# EAGLE board MS14-N.v1.3 (EAGLE 7.5.0)
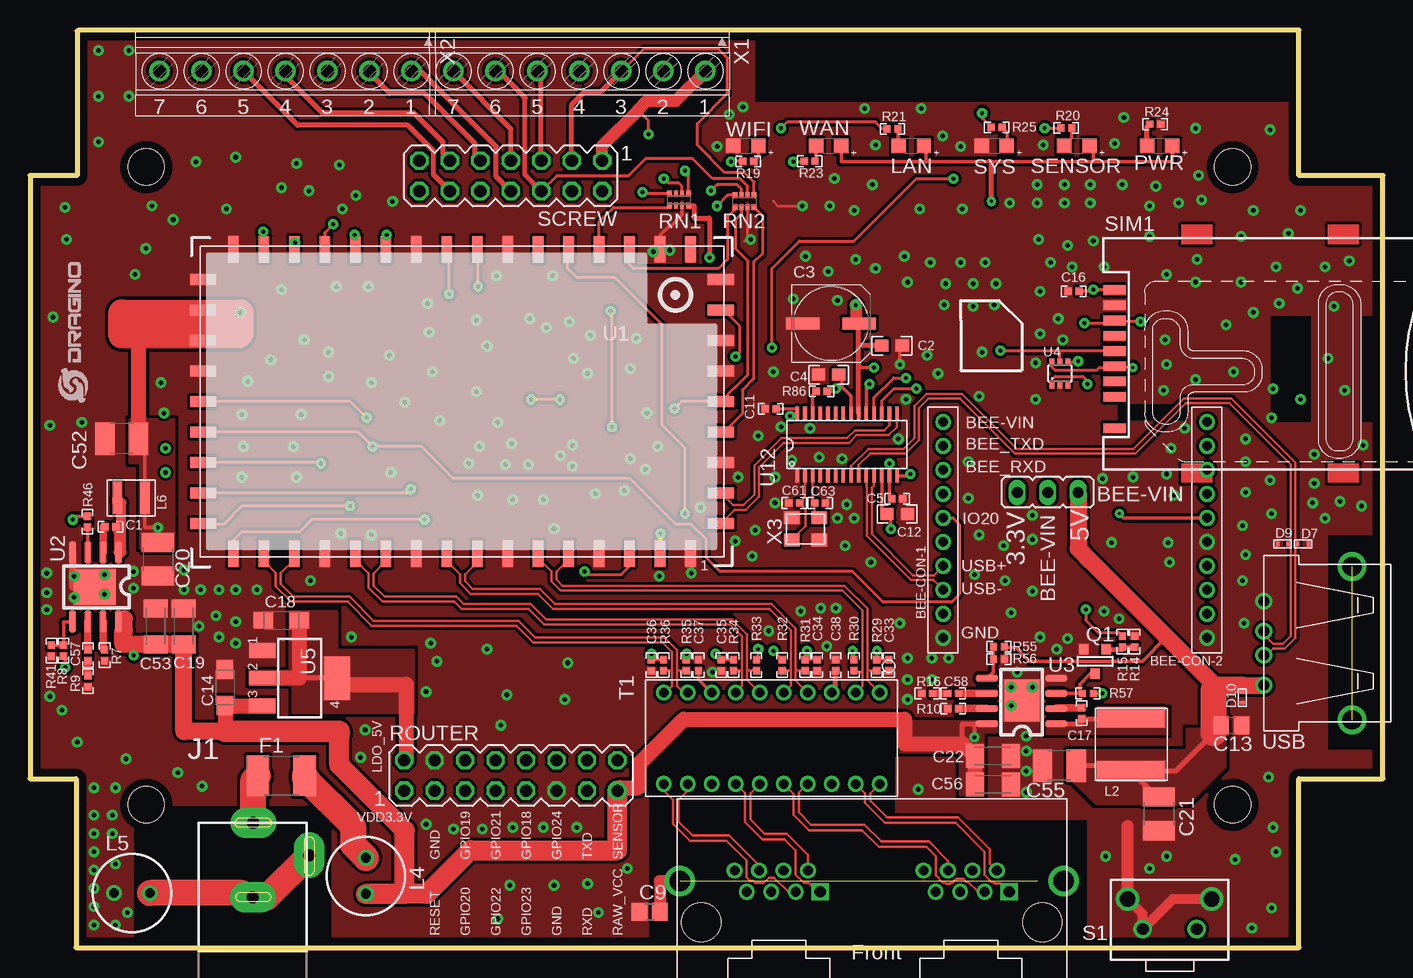
[diagram p0: board, top side]
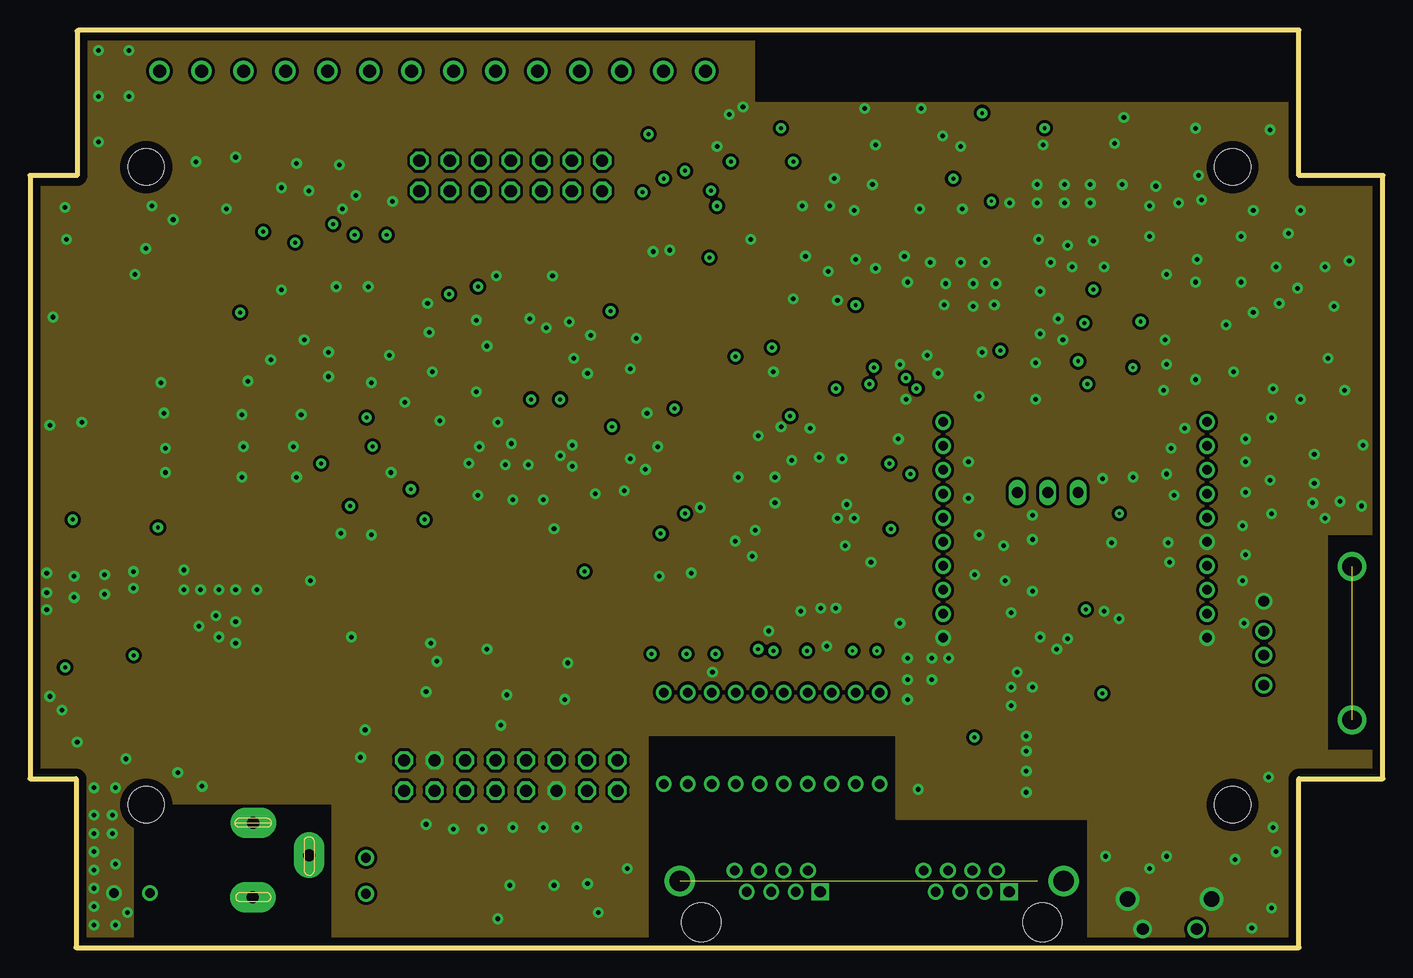
[diagram p1: board, inner layer Route2]
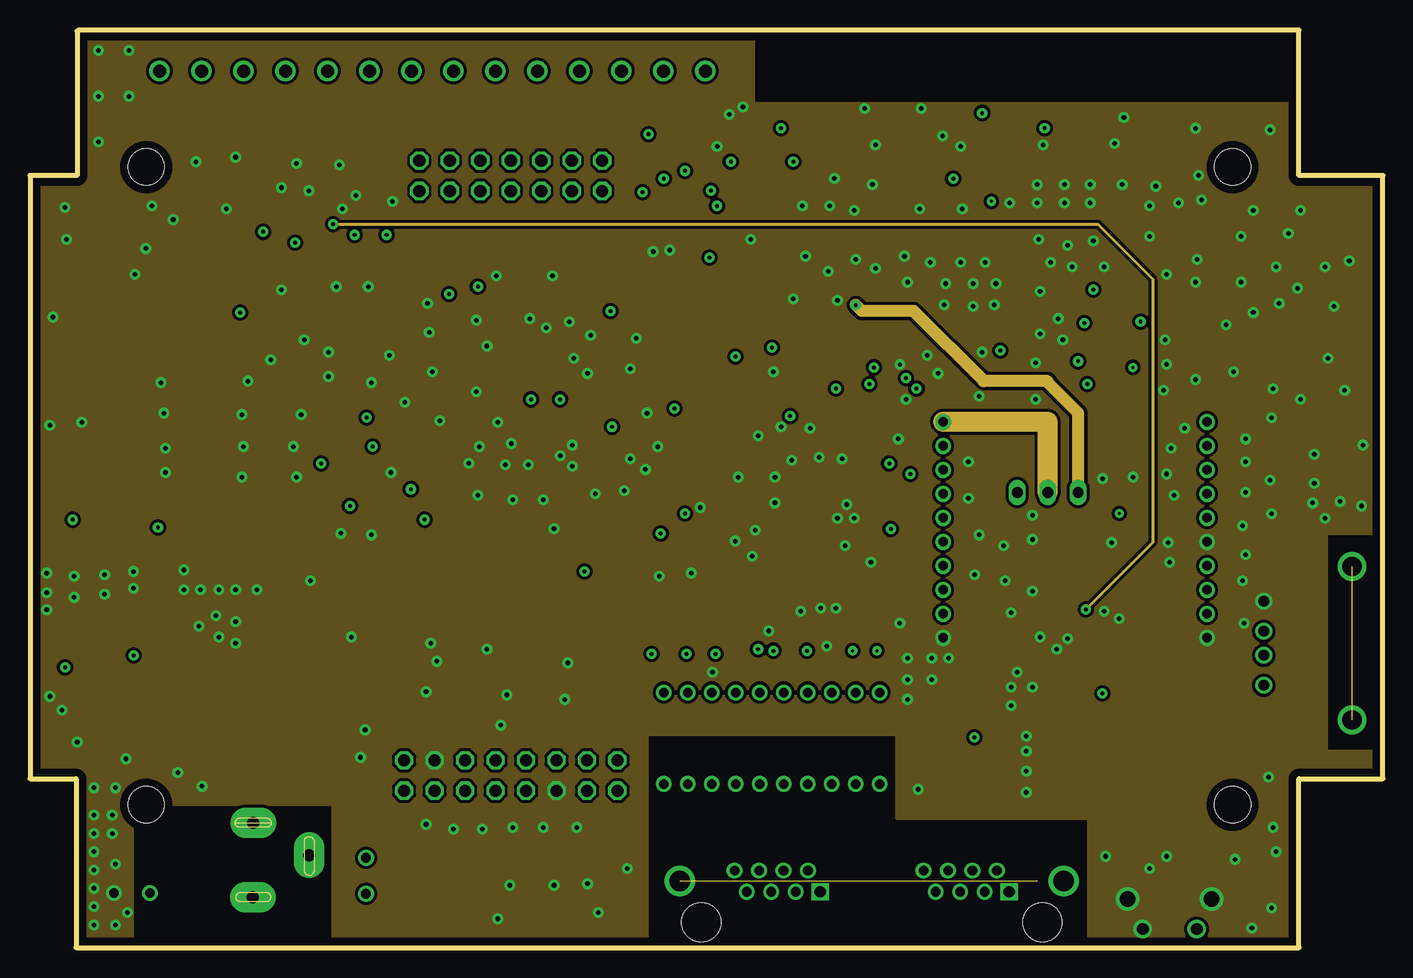
[diagram p2: board, inner layer Route15]
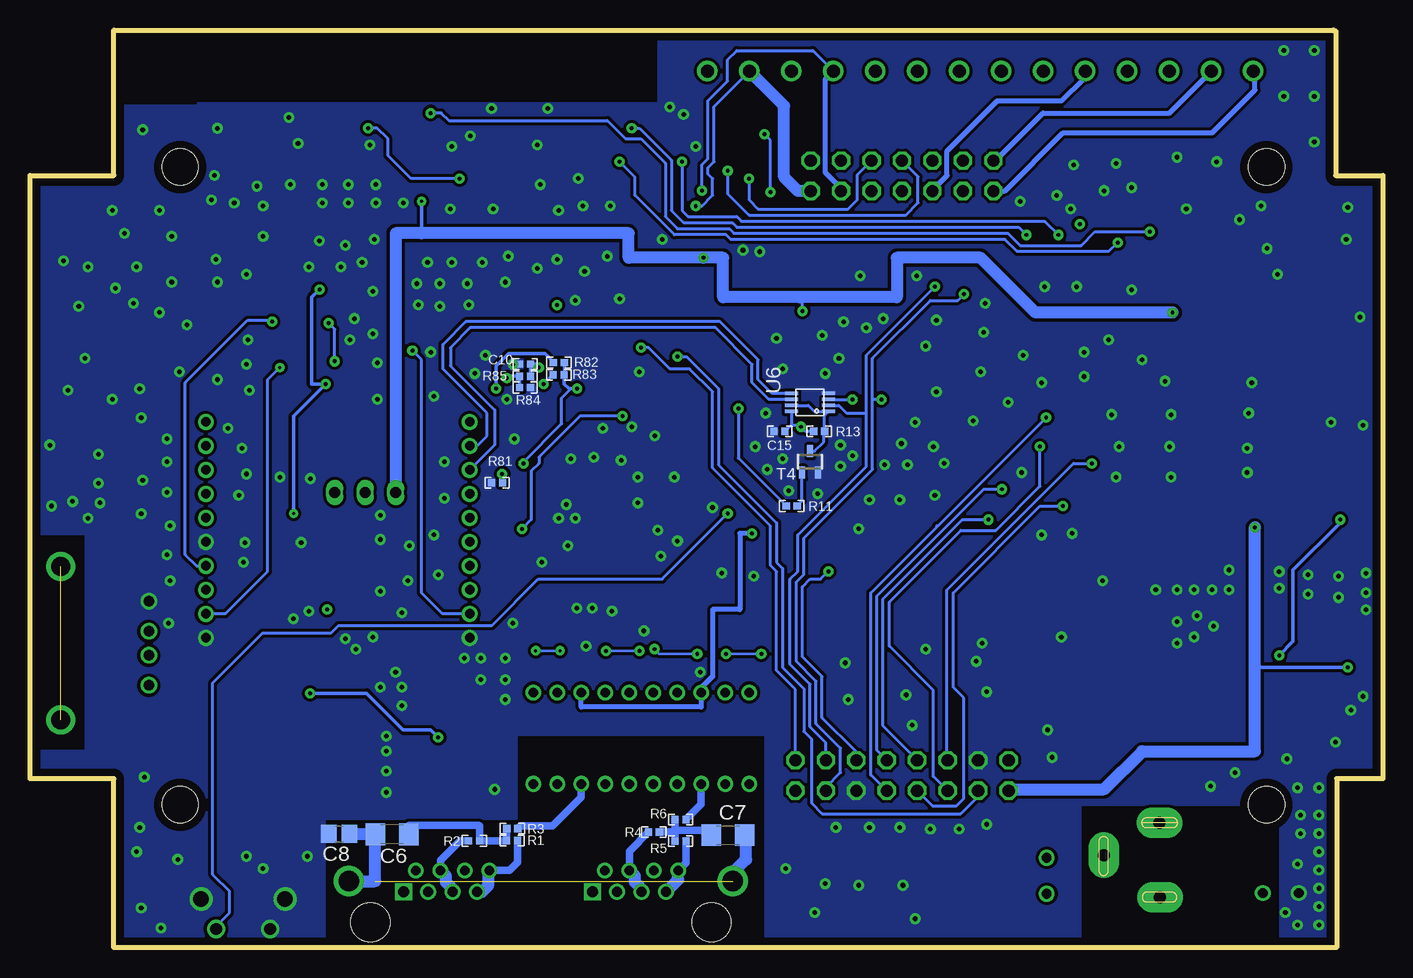
[diagram p3: board, bottom side, seen from below]

Size 112.78 x 76.5 mm. Coordinates in mm from the lower left corner, seen from the top.
Outline: 105.79,0 105.79,14.08 112.78,14.08 112.78,64.37 105.79,64.37 105.79,76.5 4.1,76.5 4.1,76.44 3.94,76.44 3.94,64.37 0,64.37 0,14.08 3.85,14.08 3.85,0 105.79,0
Copper layers (1*2+15*16): Top 0.035mm / dielectric 1.5mm / Route2 0.035mm / dielectric 0.15mm / Route15 0.035mm / dielectric 0.2mm / Bottom 0.035mm
Design rules "default *": minimum track width 5mil, minimum drill 10mil, track to track 8mil, track to pad 8mil, pad to pad 8mil, via to via 10mil, smd to smd 8mil, copper to edge 26mil, drill to drill 10mil, minimum pad ring 10mil, minimum via ring 10mil, stop-mask expansion 1mil, vias tented up to drill 30mil, thermal gap 10mil
Net classes: 0 default: width 0.203 mm, clearance 0.152 mm; 1 power: width 0.61 mm, drill 0.406 mm, clearance 0.254 mm; 2 gnd: width 0.305 mm, drill 0.33 mm, clearance 0.254 mm; 3 usbvcc: width 0.508 mm, drill 0.61 mm, clearance 0.254 mm; 4 aref: width 0.406 mm, drill 0.61 mm, clearance 0.254 mm; 6 usbtrace-4layer: width 0.191 mm, clearance 0.203 mm
Holes 3 mm at 100.25,11.91 9.7,11.91 9.7,65.08 100.25,65.08
bRestrict: area 98.9,70.3 to 105,75.9

## Footprints (pad centres in the part's own frame; a part is rotated, then mirrored left to right if it is on the bottom)
10P-2.0MM = drill 0.8 pad 1.27: 1 0,9; 2 0,7; 3 0,5; 4 0,3; 5 0,1; 6 0,-1; 7 0,-3; 8 0,-5; 9 0,-7; 10 0,-9
JP2 = drill 0.914 long: 1 -2.54,0; 2 0,0; 3 2.54,0
C0402 = smd 0.61 x 0.61: 1 -0.457,0; 2 0.457,0
C0603 = smd 1.1 x 1: 1 -0.85,0; 2 0.85,0
UD-6,3X5,8_NICHICON = smd 2.8 x 1: + 2.35,0; - -2.35,0
C1206 = smd 1.6 x 1.8: 1 -1.4,0; 2 1.4,0
C0805 = smd 1.3 x 1.5: 1 -0.85,0; 2 0.85,0
SMC_A = smd 1.6 x 1.4: + -1.5,0; - 1.5,0
C1206K = smd 1.5 x 2: 1 -1.5,0; 2 1.5,0
C1210 = smd 1.6 x 2.7: 1 -1.4,0; 2 1.4,0
SOD−923 = smd 0.3 x 0.4: P$1 -0.45,0; P$2 0.45,0
L1812 = smd 1.9 x 3.4: 1 -1.95,0; 2 1.95,0
POWER_JACK_SLOT = drill 1 pad 2.54 long: GND@1 0,0; GND@2 4.7,3.5; PWR 0.04,6.2
ETHERNET-1X2 = drill 0.94 pad 1.27 square: 1-1 4.305,-2.54; 2-1 -11.445,-2.54 | drill 0.8: 1-2 5.325,-4.32; 1-3 6.345,-2.54; 1-4 7.365,-4.32; 1-5 8.385,-2.54; 1-6 9.405,-4.32; 1-7 10.425,-2.54; 1-8 11.445,-4.32; 2-2 -10.425,-4.32; 2-3 -9.405,-2.54; 2-4 -8.385,-4.32; 2-5 -7.365,-2.54; 2-6 -6.345,-4.32; 2-7 -5.325,-2.54; 2-8 -4.305,-4.32 | drill 1.7: S1 16,-3.43; S2 -16,-3.43 | hole 3.25: -14.225,0; 14.225,0
SWPA6028S = smd 5.7 x 1.7: P$1 0,2.25; P$2 0,-2.25
BS11 = drill 0.8: 1 -1.5,0; 2 1.5,0
SWPA3010S = smd 0.8 x 2.7: P$1 -1.15,0; P$2 1.15,0
CHIP-LED0805 = smd 1.2 x 1.2: A 0,-1.05; C 0,1.05
SOT-23 = smd 0.787 x 0.889: 1 0,-1.016; 2 -0.95,1.016; 3 0.95,1.016
R0402 = smd 0.61 x 0.61: 1 -0.457,0; 2 0.457,0
4X0402ARV341 = smd 0.4 x 0.5: 1 -0.8,-0.5; 4 0.8,-0.5; 5 0.8,0.5; 8 -0.8,0.5 | smd 0.3 x 0.5: 2 -0.25,-0.5; 3 0.25,-0.5; 6 0.25,0.5; 7 -0.25,0.5
MA08-2 = drill 1.016 octagon: 1 -8.89,-1.27; 2 -8.89,1.27; 3 -6.35,-1.27; 4 -6.35,1.27; 5 -3.81,-1.27; 6 -3.81,1.27; 7 -1.27,-1.27; 8 -1.27,1.27; 9 1.27,-1.27; 10 1.27,1.27; 11 3.81,-1.27; 12 3.81,1.27; 13 6.35,-1.27; 14 6.35,1.27; 15 8.89,-1.27; 16 8.89,1.27
SWITCH_6X6X5 = drill 0.991 pad 1.524: 1 -2.25,0; 2 2.25,0 | drill 1.295 pad 1.905: 3 3.5,2.5; 4 -3.5,2.5
MA07-2 = drill 1.016 octagon: 1 -7.62,-1.27; 2 -7.62,1.27; 3 -5.08,-1.27; 4 -5.08,1.27; 5 -2.54,-1.27; 6 -2.54,1.27; 7 0,-1.27; 8 0,1.27; 9 2.54,-1.27; 10 2.54,1.27; 11 5.08,-1.27; 12 5.08,1.27; 13 7.62,-1.27; 14 7.62,1.27
SIM-0002 = smd 0.8 x 1.9: C1 5.3,19.05; C2 2.76,19.05; C3 0.22,19.05; C4 -2.32,19.05; C5 4.03,19.05; C6 1.49,19.05; C7 -1.05,19.05; C8 -3.59,19.05; C9 -6.21,19.05
RIONET_H2038 = drill 0.8: 1 -3.81,9; 2 -3.81,7; 3 -3.81,5; 4 -3.81,3; 5 -3.81,1; 6 -3.81,-1; 7 -3.81,-3; 8 -3.81,-5; 9 -3.81,-7; 10 -3.81,-9; 11 3.81,-9; 12 3.81,-7; 13 3.81,-5; 14 3.81,-3; 15 3.81,-1; 16 3.81,1; 17 3.81,3; 18 3.81,5; 19 3.81,7; 20 3.81,9
SOT323 = smd 0.5 x 1: 1 0,0.9; 2 -0.65,-0.9; 3 0.65,-0.9
HE50 = smd 0.9 x 2.198: 1 -19.05,12.69; 2 -16.51,12.69; 3 -13.97,12.69; 4 -11.43,12.69; 5 -8.89,12.69; 6 -6.35,12.69; 7 -3.81,12.69; 8 -1.27,12.69; 9 1.27,12.69; 10 3.81,12.69; 11 6.35,12.69; 12 8.89,12.69; 13 11.43,12.69; 14 13.97,12.69; 15 16.51,12.69; 16 19.05,12.69; 26 19.05,-12.69; 27 16.51,-12.69; 28 13.97,-12.69; 29 11.43,-12.69; 30 8.89,-12.69; 31 6.35,-12.69; 32 3.81,-12.69; 33 1.27,-12.69; 34 -1.27,-12.69; 35 -3.81,-12.69; 36 -6.35,-12.69; 37 -8.89,-12.69; 38 -11.43,-12.69; 39 -13.97,-12.69; 40 -16.51,-12.69; 41 -19.05,-12.69 | smd 2.198 x 0.9: 17 21.579,10.16; 18 21.579,7.62; 19 21.579,5.08; 20 21.579,2.54; 21 21.579,0; 22 21.579,-2.54; 23 21.579,-5.08; 24 21.579,-7.62; 25 21.579,-10.16; 42 -21.579,-10.16; 43 -21.579,-7.62; 44 -21.579,-5.08; 45 -21.579,-2.54; 46 -21.579,0; 47 -21.579,2.54; 48 -21.579,5.08; 49 -21.579,7.62; 50 -21.579,10.16
RT8250-SOP8 = smd 1.88 x 0.61: 1 -1.219,0; 2 -1.219,-1.27; 3 -1.219,-2.54; 4 -1.219,-3.81; 5 4.547,-3.81; 6 4.547,-2.54; 7 4.547,-1.27; 8 4.547,0 | smd 2.997 x 3.505: 9 1.651,-1.956
SOT363 = smd 0.42 x 0.6: 1 -0.65,-0.95; 2 0,-0.95; 3 0.65,-0.95; 4 0.65,0.95; 5 0,0.95; 6 -0.65,0.95
SOT223 = smd 1.219 x 2.235: 1 -2.311,-3.099; 2 0,-3.099; 3 2.311,-3.099 | smd 3.6 x 2.2: 4 0,3.099
US8 = smd 0.3 x 1.1: 1 -0.75,-1.55; 2 -0.25,-1.55; 3 0.25,-1.55; 4 0.75,-1.55; 5 0.75,1.55; 6 0.25,1.55; 7 -0.25,1.55; 8 -0.75,1.55
USB_HUB_FE1.1S = smd 0.3 x 1.1: 1 -4.16,-2.6; 2 -3.52,-2.6; 3 -2.88,-2.6; 4 -2.24,-2.6; 5 -1.6,-2.6; 6 -0.96,-2.6; 7 -0.32,-2.6; 8 0.32,-2.6; 9 0.96,-2.6; 10 1.6,-2.6; 11 2.24,-2.6; 12 2.88,-2.6; 13 3.52,-2.6; 14 4.16,-2.6; 15 4.16,2.62; 16 3.52,2.62; 17 2.88,2.62; 18 2.24,2.62; 19 1.6,2.62; 20 0.96,2.62; 21 0.32,2.62; 22 -0.32,2.62; 23 -0.96,2.62; 24 -1.6,2.62; 25 -2.24,2.62; 26 -2.88,2.62; 27 -3.52,2.62; 28 -4.16,2.62
USB_C42562 = drill 0.9: 1 -3.5,5.29; 2 -1,5.29; 3 1,5.29; 4 3.5,5.29 | drill 1.6: 5 -6.4,-2.06; 6 6.4,-2.06
1751293 = drill 1.1 pad 1.7: 1 -10.5,-0.1; 2 -7,-0.1; 3 -3.5,-0.1; 4 0,-0.1; 5 3.5,-0.1; 6 7,-0.1; 7 10.5,-0.1
SMARTPRJ_CRYSTAL-3.2-2.5 = smd 1.3 x 1.05: 1 -1.15,-0.925; 2 1.15,-0.925; 3 1.15,0.925; 4 -1.15,0.925

## Placement (x,y rotation side)
BEE-CON-1  BEE-1  [10P-2.0MM]  76.12,34.82 0 top
BEE-CON-2  BEE-1  [10P-2.0MM]  98.12,34.82 180 top
BEE-VIN  1x3 , 2.54 弯针  [JP2]  84.84,37.96 0 top
C1  0.1u,50v  [C0402]  6.71,35.08 0 top
C2  10uf 10v  [C0603]  71.86,50.17 0 top
C3  100uF 16v TBD  [UD-6,3X5,8_NICHICON]  66.78,52.03 0 top
C4  10uf 10v  [C0603]  66.57,47.76 180 top
C5  0.1u  [C0402]  72.29,37.42 0 top
C6  1000pF,2kv  [C1206]  82.59,9.44 180 bottom
C7  1000pF,2kv  [C1206]  54.59,9.37 0 bottom
C8  0.1u,100V  [C0805]  87,9.48 0 bottom
C9  0.1u,100V  [C0805]  51.67,2.97 0 top
C10  0.1u  [C0402]  71.5,48.65 180 bottom
C11  0.1u  [C0402]  61.75,44.91 180 top
C12  10uf 10v  [C0603]  72.29,36.15 0 top
C13  10u,10V  [C0805]  100.15,18.52 0 top
C14  10uF,10V  [SMC_A]  16.26,21.7 90 top
C15  0.1u  [C0402]  50.29,43.04 180 bottom
C16  0.1u  [C0402]  87,54.72 0 top
C17  0.1u,50v  [C0402]  87.66,19.54 270 top
C18  10uF,10V  [SMC_A]  20.95,27.29 180 top
C19  10uf,50v  [C1206K]  12.83,26.78 90 top
C20  22uF,10v  [C1210]  10.67,32.37 270 top
C21  22uf,10v  [C1210]  94.11,11.16 270 top
C22  10uf,50v  [C1206K]  80.26,15.98 0 top
C33  0.1u 10v  [C0402]  71.6,23.55 270 top
C34  0.1u 10v  [C0402]  65.64,23.55 270 top
C35  0.1u 10v  [C0402]  57.63,23.55 270 top
C36  0.1u 10v  [C0402]  51.79,23.55 270 top
C37  0.1u  [C0402]  55.73,23.55 90 top
C38  0.1u  [C0402]  67.16,23.55 90 top
C52  22uF,10v  [C1210]  7.65,42.43 180 top
C53  10uf,50v  [C1206K]  10.46,26.78 90 top
C55  22fu,10v  [C1210]  85.8,15.17 180 top
C56  10uf,50v  [C1206K]  80.29,13.6 0 top
C57  2.7nf  [C0402]  4.83,24.37 90 top
C58  2.7nf  [C0402]  76.96,21.19 0 top
C61  18pF  [C0402]  63.7,37.07 0 top
C63  18pF  [C0402]  65.86,37.07 180 top
D7  ESD7951ST5G  [SOD−923]  106.12,33.64 180 top
D9  ESD7951ST5G  [SOD−923]  104.44,33.64 0 top
D10  ESD7951ST5G  [SOD−923]  101.07,20.86 90 top
F1  2A  [L1812]  20.95,14.33 0 top
J1  POWER_JACKSLT  [POWER_JACK_SLOT]  18.58,4.21 0 top
J2  ETHERNET_2PORT  [ETHERNET-1X2]  70.18,2.1 180 top
L2  6.8uH / SWPA6045S6R8MT  [SWPA6028S]  91.8,16.95 0 top
L4  bead  [BS11]  28.02,5.98 90 top
L5  bead  [BS11]  8.51,4.55 0 top
L6  4.7uH /SWPA3015S4R7MT  [SWPA3010S]  8.43,37.5 0 top
LAN  GREEN  [CHIP-LED0805]  73.47,66.84 90 top
PWR  GREEN  [CHIP-LED0805]  94.17,66.84 90 top
Q1  BSS138-7-F  [SOT-23]  88.77,23.86 0 top
R1  75  [R0402]  72.59,8.91 0 bottom
R2  75  [R0402]  75.75,8.9 180 bottom
R3  75  [R0402]  72.57,9.91 180 bottom
R4  75  [R0402]  60.76,9.63 180 bottom
R5  75  [R0402]  58.55,8.87 0 bottom
R6  75  [R0402]  58.55,10.67 180 bottom
R7  180K  [R0402]  6.22,24.37 270 top
R8  75K 1%  [R0402]  2.79,24.75 270 top
R9  16K 1%  [R0402]  4.83,22.21 90 top
R10  180K  [R0402]  76.96,19.92 180 top
R11  4.7K  [R0402]  49.28,36.81 180 bottom
R13  100K  [R0402]  46.99,43.04 180 bottom
R14  47K,NL  [R0402]  92.08,25.51 270 top
R15  4.7k  [R0402]  91.06,25.51 270 top
R16  24K  [R0402]  74.8,21.19 180 top
R19  270  [R0402]  59.87,65.54 0 top
R20  330  [R0402]  86.39,68.34 0 top
R21  330  [R0402]  71.89,68.24 0 top
R23  330  [R0402]  64.99,65.56 0 top
R24  330  [R0402]  93.8,68.65 180 top
R25  270  [R0402]  80.59,68.38 0 top
R29  49.9  [R0402]  70.59,23.55 90 top
R30  49.9  [R0402]  68.68,23.55 90 top
R31  49.9  [R0402]  64.62,23.55 90 top
R32  49.9  [R0402]  62.71,23.55 90 top
R33  49.9  [R0402]  60.56,23.55 90 top
R34  49.9  [R0402]  58.65,23.55 90 top
R35  49.9  [R0402]  54.71,23.55 90 top
R36  49.9  [R0402]  52.81,23.55 90 top
R41  24K 1%  [R0402]  1.78,24.75 90 top
R46  100K  [R0402]  4.8,35.49 270 top
R55  53.6K 1%  [R0402]  80.77,25.08 0 top
R56  10K 1%  [R0402]  80.77,24.04 180 top
R57  100K  [R0402]  88.19,21.19 0 top
R81  2.7K 1%  [R0402]  73.84,38.74 0 bottom
R82  100k  [R0402]  68.68,48.78 0 bottom
R83  100k  [R0402]  68.71,47.76 0 bottom
R84  100k  [R0402]  71.5,46.69 180 bottom
R85  47K  [R0402]  71.5,47.63 0 bottom
R86  100k  [R0402]  65.99,46.36 0 top
RN1  4D02WGJ0000TCE 0ohm  [4X0402ARV341]  54.1,62.34 0 top
RN2  4D02WGJ0000TCE 0ohm  [4X0402ARV341]  59.56,62.21 0 top
ROUTER  [MA08-2]  40.08,14.34 0 top
S1  [SWITCH_6X6X5]  95.01,1.54 0 top
SCREW  [MA07-2]  40.08,64.34 180 top
SENSOR  GREEN  [CHIP-LED0805]  87.27,66.84 90 top
SIM1  SIM_CARD_CON_8JISEN,NL  [SIM-0002]  109.47,49.51 90 top
SYS  GREEN  [CHIP-LED0805]  80.37,66.84 90 top
T1  RJ45_TRANSFORMER_HST2038DR  [RIONET_H2038]  61.83,17.45 270 top
T4  2SC4081/SC70  [SOT323]  47.75,40.5 0 bottom
U1  HE  [HE50]  36.02,45.52 180 top
U2  RT7272  [RT8250-SOP8]  7.37,31.73 270 top
U3  RT7272  [RT8250-SOP8]  84.33,18.65 180 top
U4  SMF05C,NL  [SOT363]  85.85,47.86 0 top
U5  BL1117-50CX  [SOT223]  22.48,22.46 270 top
U6  NC7WZ125  [US8]  47.75,45.45 90 bottom
U12  USB_HUB_FE1.1S  [USB_HUB_FE1.1S]  68.12,41.92 0 top
U$2  [SMA-JACK]  6.99,18.52 270 top
U$6  [SMA-JACK]  6.99,59.16 270 top
U$7  [SMA-JACK]  6.99,44.56 180 top
U$8  [SMA-JACK]  6.99,40.11 270 top
U$10  [SMA-JACK]  40,7.09 0 top
U$11  [LOGO-SILK-NEW]  4.83,45.45 90 top
USB  USB_C42562  [USB_C42562]  108.15,25.37 90 top
WAN  GREEN  [CHIP-LED0805]  66.58,66.84 90 top
WIFI  GREEN  [CHIP-LED0805]  59.68,66.84 90 top
X1  1751293  [1751293]  45.8,72.97 180 top
X2  1751293  [1751293]  21.3,72.97 180 top
X3  12Mhz,X322512MMB4SI  [SMARTPRJ_CRYSTAL-3.2-2.5]  64.64,34.91 180 top

## Library data of the parts
BEE-CON-1 BEE-CON-2 C2 C4 C5 C10-C12 C15 C16 C61 C63 L2 SIM1 U$2 U$6-U$8 U$10 USB X3 = dragino-passive
BEE-VIN C1 C3 C6-C9 C13 C17 C19-C22 C33-C38 C52 C53 C55-C58 D7 D9 D10 F1 J1 J2 L6 LAN PWR R1-R11 R13-R16 R19-R21 R23-R25 R29-R36 R41 R46 R55-R57 R81-R86 S1 SENSOR SYS T1 U1-U4 U6 U12 U$11 WAN WIFI = dragino
C14 C18 = rcl
L4 L5 = inductor-neosid; OC_FARNELL: unknown; OC_NEWARK: unknown
Q1 ROUTER SCREW = dragino; OC_FARNELL: unknown; OC_NEWARK: unknown
RN1 RN2 = resistor-dil; OC_FARNELL: unknown; OC_NEWARK: unknown
T4 = zetex; MPN: DSS4160U-7; OC_FARNELL: 1710696; OC_NEWARK: 25R4558
U5 = linear
X1 X2 = con-phoenix-350; OC_FARNELL: unknown; OC_NEWARK: unknown

## Nets
2.0V_CTL: C37.1 C38.1 T1.3 T1.8 U1.2
5V_LDO: C18.+ ROUTER.2 U5.2 U5.4
+3V3: BEE-VIN.1 C15.1 C20.1 C52.1 L6.P$2 LAN.A PWR.A R8.2 R13.2 RN1.4 ROUTER.1 SENSOR.A U1.23 U1.24 U6.8 WAN.A
+5V: BEE-VIN.3 C2.1 C3.+ C10.1 C13.1 C21.1 C55.1 D10.P$2 L2.P$2 R55.2 R85.2 U12.20 USB.1
/BEE_OE: R13.1 T4.1 U6.1 U6.7
AGND: C6.2 C7.2 C8.2 C9.2 J2.S1 J2.S2
BEE-RXD: BEE-CON-1.3 U6.6
BEE-TXD: BEE-CON-1.2 U6.5
BEE-VIN: BEE-CON-1.1 BEE-VIN.2
CLK_N: C63.2 U12.3 X3.1
CLK_P: C61.2 U12.2 X3.3
GND [gnd]: BEE-CON-1.10 BEE-CON-2.1 BEE-CON-2.5 C2.2 C3.- C4.2 C5.2 C8.1 C9.1 C10.2 C11.2 C12.2 C13.2 C14.- C15.2 C16.1 C18.- C19.2 C20.2 C21.2 C22.2 C33.2 C34.2 C35.2 C36.2 C37.2 C38.2 C52.2 C53.2 C55.2 C56.2 C61.1 C63.1 D7.P$1 D9.P$1 D10.P$1 L5.1 Q1.2 R7.2 R9.1 R10.2 R14.1 R16.2 R24.1 R41.1 R56.1 R81.1 R84.1 RN1.3 RN2.3 ROUTER.4 ROUTER.11 S1.1 S1.3 S1.4 SIM1.C5 SYS.C T4.3 U1.1 U1.4 U1.7 U1.10 U1.13 U1.22 U1.25 U1.26 U1.32 U1.35 U1.40 U1.42 U1.44 U1.45 U1.48 U2.4 U2.9 U3.4 U3.9 U4.2 U5.1 U6.4 U12.1 USB.4 WIFI.C X3.2 X3.4
GPIO1: R15.1 U1.29
GPIO11: S1.2 U1.37
GPIO15: RN1.1 U1.38
GPIO16: RN2.1 U1.39
GPIO18: ROUTER.10 U1.18
GPIO19: ROUTER.6 U1.19
GPIO20: BEE-CON-1.5 ROUTER.5 U1.20
GPIO21: ROUTER.8 U1.16
GPIO22: ROUTER.7 U1.17
GPIO23: ROUTER.9 U1.21
GPIO24: ROUTER.12 U1.3
GPIO26: RN2.4 U1.47
GPIO27: R11.2 RN2.2 U1.46
GPIO28: R25.1 U1.27
LED0: R19.1 U1.30
LED2: R21.1 U1.31
LED6: R23.1 U1.28
N$1: R25.2 SYS.A
N$2: J1.GND@1 J1.GND@2 L5.2
N$3: F1.2 L4.2
N$4: R11.1 T4.2
N$5: RN1.8 SCREW.1 X1.1
N$6: RN2.8 SCREW.2 X1.2
N$7: R6.1 T1.13
N$8: RN2.5 SCREW.3 X1.3
N$9: RN2.7 SCREW.4 X1.4
N$10: RN1.6 SCREW.5 X1.5
N$11: RN2.6 SCREW.6 X1.6
N$12: F1.1 J1.PWR
N$13: R20.2 SENSOR.C
N$14: RN1.5 SCREW.7 X1.7
N$15: SCREW.8 X2.1
N$16: Q1.1 R57.1 U3.3
N$17: R10.1 U3.7
N$18: R86.1 U12.26
N$19: Q1.3 R14.2 R15.2
N$20: C58.2 U3.6
N$22 [gnd]: R55.1 R56.2 U3.5
N$23: R19.2 WIFI.A
N$24: C1.2 L6.P$1 U2.1
N$25: R46.2 U2.3
N$26: R7.1 U2.7
N$27: C1.1 U2.2
N$29: C57.1 R9.2
N$30: LAN.C R21.2
N$31: C57.2 U2.6
N$32: C58.1 R16.1
N$33: SCREW.9 X2.2
N$34: C17.2 L2.P$1 U3.1
N$35: PWR.C R24.2
N$36: SCREW.10 X2.3
N$37: SCREW.11 X2.4
N$38: SCREW.13 X2.6
N$39: C35.1 R33.2 R34.2
N$40: C36.1 R35.2 R36.2
N$41: J2.2-7 J2.2-8 R1.2
N$42: J2.2-4 J2.2-5 R2.2
N$43: C33.1 R29.2 R30.2
N$44: C34.1 R31.2 R32.2
N$45: R3.1 T1.18
N$46: C6.1 R1.1 R2.1 R3.2
N$47: SCREW.14 X2.7
N$48: SCREW.12 X2.5
N$49: R8.1 R41.2 U2.5
N$51: J2.1-7 J2.1-8 R5.2
N$52: J2.1-4 J2.1-5 R4.2
N$54: C7.1 R4.1 R5.1 R6.2
N$55: C17.1 U3.2
N$109: R81.2 U12.14
N$111: R82.1 U12.17
N$112: R83.1 U12.19
N$113: R84.2 R85.1 U12.18
NET_LED: BEE-CON-2.3
OPTIONAL_ANT: U1.41
P0_R_N: J2.2-6 T1.17
P0_R_P: J2.2-3 T1.16
P0_RX_N: R31.1 T1.4 U1.8
P0_RX_P: R32.1 T1.5 U1.9
P0_T_N: J2.2-2 T1.20
P0_T_P: J2.2-1 T1.19
P0_TX_N: R29.1 T1.1 U1.5
P0_TX_P: R30.1 T1.2 U1.6
P4_R_N: J2.1-6 T1.12
P4_R_P: J2.1-3 T1.11
P4_RX_N: R35.1 T1.9 U1.14
P4_RX_P: R36.1 T1.10 U1.15
P4_T_N: J2.1-2 T1.15
P4_T_P: J2.1-1 T1.14
P4_TX_N: R33.1 T1.6 U1.11
P4_TX_P: R34.1 T1.7 U1.12
RESET_ROUTE: ROUTER.3 U1.43
SENSOR_LED: R20.1 ROUTER.16
SIM_CLK: BEE-CON-1.9 SIM1.C3 U4.5
SIM_DATA: BEE-CON-2.2 SIM1.C7 U4.6
SIM_RST: BEE-CON-2.4 SIM1.C2 U4.4
SIM_VCC: BEE-CON-2.6 C16.2 SIM1.C1 U4.1
UART_RX: ROUTER.13 U1.33 U6.3
UART_TX: ROUTER.14 U1.34 U6.2
USB1_N: BEE-CON-1.8 U12.10
USB1_P: BEE-CON-1.7 U12.11
USB2_N [usbtrace-4layer]: D7.P$2 U12.8 USB.2
USB2_P [usbtrace-4layer]: D9.P$2 U12.9 USB.3
USB3.3: C4.1 C5.1 R82.2 R83.2 R86.2 U12.13 U12.21
USB3_N: U12.6
USB3_P: U12.7
USB4_N: U12.4
USB4_P: U12.5
USB_GND [gnd]: USB.5 USB.6
USB_N: U1.50 U12.15
USB_P: U1.49 U12.16
VCC18: C11.1 C12.1 U12.12 U12.28
VIN: C14.+ C19.1 C22.1 C53.1 C56.1 L4.1 R46.1 R57.2 ROUTER.15 U2.8 U3.8 U5.3
YELLOW: R23.2 WAN.C

## Tracks (layer width: path | path; a pad name or v marks a point on that pad's centre or on a via)
2.0V_CTL  (via drill 0.33)
  Top 0.305: C37.1 55.73,22.36 T1.8
  Top 0.406: U1.2 52.58,32.84 v52.58,34.53 | T1.3 67.16,21.26 C38.1
  Bottom 0.406: v52.58,34.53 53.59,34.53 53.59,28.18 55.88,28.18 55.88,22.59 56.83,21.64 T1.8 56.83,20.05 66.83,20.05 T1.3
5V_LDO
  Top 0.406: U5.4 22.23,22.46
  Top 1.27: U5.2 22.23,22.46 22.48,22.46 22.48,27.29 C18.+ | U5.4 25.58,21.95 31.37,21.95 31.37,15.61 ROUTER.2
  pour Top (no thermals): 21.59,28.05 25.65,28.05 25.65,24.87 32,24.87 32,19.54 21.84,19.54 21.84,21.95 18.29,21.95 18.29,23.1 21.59,23.1
+3V3  (via drill 0.25, 0.33)
  Top 0.254: v48.51,43.42 48.51,52.94 v48.39,53.07 | 14.61,51.42 14.61,50.77 U1.23
  Top 0.305: PWR.A 95.22,65.51 88.65,65.51 | 88.65,65.51 80.14,65.51 74.68,65.51 | 74.68,65.51 67.63,65.51 WAN.A | LAN.A 74.68,66.84 74.68,65.51 | C20.1 v10.67,35.03 9.58,35.03 L6.P$2 9.58,42.43 C52.1 | R8.2 2.92,24.29 v2.92,23.35 | SENSOR.A 88.65,66.84 88.65,65.51
  Top 0.406: RN1.4 55.37,61.84 55.37,60.82 56.64,60.82 v56.64,57.51 | v80.14,62.21 80.14,65.51
  Top 0.61: 14.22,51.8 14.44,52.01 U1.24
  Top 1.27: C52.1 9.05,51.42 9.14,51.42
  Top 2.184: 7.62,51.04 7.62,52.94 v17.53,52.94 17.53,51.16 17.4,51.04 7.62,51.04 | 7.62,51.04 8,51.42 9.14,51.42 14.61,51.42 14.22,51.8
  Bottom 0.254: U6.8 49.3,43.57 | 49.3,43.57 C15.1 | R13.2 48.13,43.04 v48.51,43.42 48.67,43.57 49.3,43.57 | v48.39,53.07 48.39,53.96 48.64,54.21
  Bottom 0.305: v80.14,62.21 80.14,59.55 | 10.67,28.94 v10.67,35.03 | v2.92,23.35 10.67,23.35 10.67,23.48
  Bottom 1.016: ROUTER.1 31.07,13.19 23.24,13.19 20.07,16.37 10.67,16.37 10.67,23.48 v10.67,35.03 | v17.53,52.94 28.96,52.94 33.53,57.51 40.51,57.51 40.51,54.21 48.64,54.21 54.99,54.21 54.99,57.51 v56.64,57.51 62.86,57.51 62.86,59.55 80.14,59.55 82.3,59.55 BEE-VIN.1
  pour Top (no thermals): 9.4,33.26 12.07,33.26 12.07,44.05 8.26,44.05 8.26,40.37 9.14,40.37 9.14,33.26
+5V  (via drill 0.33)
  Top 0.254: C13.1 99.19,18.52 98.68,19.03 | 91.69,28.18 92.46,28.18
  Top 0.305: 69.23,51.93 C3.+ | v70.36,48.37 69.34,48.37 69.08,48.62 | D10.P$2 101.07,21.87 101.09,21.87 | 88.33,32.18 88.45,32.18 | 94.74,25.89 92.71,23.86 83.31,23.86 82.17,25 81.31,25 R55.2
  Top 0.406: U12.20 69.08,48.62 69.08,50.27 | 69.08,50.27 69.08,51.98 C3.+ | C2.1 69.18,50.17 69.08,50.27 | C55.1 91.8,15.17 L2.P$2 | 98.68,17.89 95.49,14.7 L2.P$2 | L2.P$2 93.94,12.56 C21.1
  Top 1.016: v68.83,53.58 68.83,52.32 C3.+
  Top 1.422: USB.1 101.09,21.87 99.11,21.87 98.93,21.7 | 98.93,21.7 98.68,21.45 | BEE-VIN.3 87.38,33.26 88.45,32.18 92.46,28.18 94.74,25.89 98.93,21.7
  Top 2.184: 98.68,17.89 98.68,19.03 98.68,21.45
  Route15 1.016: BEE-VIN.3 87.38,44.56 84.71,47.23 | 84.84,47.23 84.71,47.23 | 84.71,47.23 79.5,47.23 73.66,53.07 69.34,53.07 v68.83,53.58
  Bottom 0.305: R85.2 C10.1 70.64,48.65 v70.36,48.37
  pour Top (no thermals): 86.61,16.49 96.39,16.49 96.39,18.27 99.7,18.27 99.7,15.1 96.52,11.92 88.9,11.92 86.61,14.21 86.61,16.37
/BEE_OE
  Bottom 0.254: U6.7 47.88,45.2 47.37,44.69 U6.1 46.53,44.37 R13.1 46.61,42.96 46.61,42.15 47.36,41.4 T4.1
AGND  (1 unrouted)
  Top 1.016: J2.S1 52.52,5.53 C9.2
  Bottom 1.016: J2.S1 54.18,6.25 53.09,7.35 53.09,9.27 C7.2 | J2.S2 83.99,5.53 C6.2 86.11,9.44 C8.2
BEE-RXD
  Bottom 0.254: U6.6 51.18,45.7 52.58,47.1 52.58,48.62 55.63,51.67 76.07,51.67 77.72,50.02 77.72,48.5 74.04,44.81 74.04,41.9 BEE-CON-1.3
BEE-TXD
  Bottom 0.254: U6.5 50.92,46.2 52.07,47.35 52.07,49 55.25,52.18 76.45,52.18 78.36,50.27 78.36,48.24 74.68,44.56 74.68,42.65 75.51,41.82 BEE-CON-1.2
BEE-VIN
  Route15 1.676: BEE-VIN.2 84.84,43.82 BEE-CON-1.1
CLK_N
  Top 0.203: U12.3 65.24,37.23 C63.2 65.41,36.22 X3.1
CLK_P
  Top 0.203: U12.2 64.6,37.51 C61.2 64.16,37.04 64.64,36.56 64.64,35.13 X3.3
GND  (via drill 0.33, 0.38)
  Top 0.203: v64.39,61.83 62.36,61.83 61.98,62.21 | RN2.3 59.81,59.16 59.56,58.91
  Top 0.254: v72.52,48.62 72.52,49.98 C2.2
  Top 0.305: RN1.3 54.35,61.07 53.47,60.18 53.34,60.18 52.58,59.42 52.58,58.27 U1.40
  Top 0.61: U2.4 3.56,30.08 U2.9
  Top 0.813: S1.4 92.76,2.79 S1.1 95.26,4.04 S1.3
  Top 1.016: S1.4 91.51,10.14
  Bottom 0.254: C10.2 72.49,48.65 v72.52,48.62
  other vias: 27.56,15.86 10.16,61.83 5.71,67.17 5.71,70.98 5.71,74.79 8.26,70.98 8.26,74.79 66.42,25.13 56.9,22.97 86.87,56.75 85.09,57.13 86.49,58.53 88.65,58.91 57.28,66.78 86.23,63.61 86.23,62.09 83.95,63.61 83.95,62.09 84.07,59.04 81.66,62.09 70.23,63.61 69.6,69.96 74.3,69.96 66.67,61.83 94.49,46.46 86.11,50.66 89.54,56.75 93.34,59.29 93.34,61.83 97.28,57.39 100.97,59.29 100.97,55.48 97.16,55.48 97.16,47.35 17.14,65.9 20.95,63.36 41.66,52.43 44.96,52.18 37.47,41.77 67.69,40.75 70.48,66.91 7.11,1.89 8.13,2.9 7.11,6.97 6.86,9.51 7.11,13.32 5.33,1.89 5.33,3.41 5.33,4.94 5.33,6.46 5.33,7.98 5.33,9.51 5.33,11.03 6.86,11.03 5.33,13.32 104.9,59.55 109.98,57.26 108.71,53.45 105.66,54.97 111.12,41.89 108.2,49.13 107.06,38.72 107.06,41.13 101.35,40.5 103.38,38.97 111,36.81 101.09,35.16 101.09,30.59 95,32.11 95.12,41.64 94.74,39.48 81.15,33.51 81.28,30.59 83.57,36.05 78.23,40.5 78.23,37.45 79.12,34.4 78.74,31.1 74.04,13.19 103.51,3.28 103.89,7.98 101.22,27.03 74.17,61.58 77.72,61.58 76.07,67.67 90.42,67.04 91.19,69.2 63.63,54.08 64.64,57.64 66.55,56.37 70.48,56.62 75.06,57.13 77.6,57.13 76.33,55.35 73.15,55.48 67.31,53.96 61.98,47.99 60.71,42.65 62.61,43.42 59.06,39.23 62.1,37.07 62.1,39.23 63.5,40.62 65.79,40.88 65.02,43.29 68.07,36.94 70.1,32.11 68.71,35.8 67.31,35.8 60.45,34.78 60.2,32.62 67.95,33.51 55.88,36.69 58.8,33.89 55.12,31.22 52.45,30.97 43.69,34.91 42.8,37.32 40.26,37.32 40.13,42.02 37.21,46.34 33.53,47.99 20.07,49 24.89,49.64 33.27,51.29 38.1,50.15 29.97,49.39 31.24,45.45 24.89,47.61 34.16,43.92 45.34,49.13 43.05,51.67 46.74,51.04 50.55,50.78 43.56,55.99 37.21,52.31 38.86,55.99 33.15,53.7 20.95,54.85 25.53,55.1 28.19,55.1 23.24,63.1 27.18,62.72 30.23,62.21 25.78,65.26 22.23,65.39 26.04,61.58 16.38,61.58 13.84,65.51 11.94,60.69 3.05,59.04 1.91,52.56 8.76,56.12 9.65,58.28 2.92,61.7 1.65,43.54 4.32,43.8 10.92,47.1 11.3,41.64 27.94,18.14 33.02,21.32 38.1,24.87 39.75,21.06 44.83,23.73 44.58,20.68 33.02,10.27 72.52,27.03 64.26,28.05 67.18,28.3 65.91,28.3 61.59,26.4 52.32,41.77 51.44,44.56 38.99,2.4 40,5.19 43.69,5.19 46.48,5.32 47.37,2.9 42.8,10.02 45.59,10.02 40.26,10.02 37.72,9.89 35.31,9.89 49.78,6.59 2.67,19.79 3.94,17.13 8,15.73 12.32,14.59 14.35,13.44 11.18,44.56 51.94,58.02 53.34,58.15 60.07,59.04 17.65,44.43 22.61,44.43 17.78,41.77 21.97,41.77 17.65,39.23 22.23,39.23 11.3,39.61 18.16,47.23 22.86,50.66 28.45,47.1 30.1,39.61 28.45,34.4 25.91,34.53 23.37,30.59 58.29,69.45 59.44,70.09 73.03,45.7 72.39,42.4 73.15,20.68 76.58,24.11 75.18,24.11 73.15,24.11 73.15,22.33 83.57,34.02 83.57,29.7 90.17,33.76 94.87,33.76 95.38,37.7 91.95,39.23 96.27,43.29 101.35,42.4 89.41,39.1 79.12,45.96 78.61,55.35 79.63,57.13 80.52,55.35 80.39,53.58 78.61,53.45 76.2,53.58 88.39,62.09 88.39,63.61 91.06,63.61 95.76,62.09 93.85,63.48 101.98,61.45 97.66,62.34 105.92,61.45 103.38,68.18 97.16,68.31 97.41,64.37 101.35,32.75 103.51,36.18 101.35,37.96 107.95,35.8 109.22,37.19 106.93,37.07 94.74,7.6 93.34,6.59 89.66,7.6 100.46,7.35 103.63,10.02 101.85,1.63 103.25,14.21 99.7,51.93 94.74,56.12 103.89,56.75 107.95,56.75 79.38,49.64 75.69,47.86 74.8,49.39 83.82,45.7 83.82,48.75 84.2,51.16 85.73,52.43 84.2,54.72 72.9,57.64 68.83,57.39 68.71,61.45 67.06,64.12 50.04,48.24 46.48,47.86 51.31,39.86 50.04,40.75 39.24,18.52 33.91,23.86 33.4,25.38 26.8,25.89 15.75,25.89 17.14,27.16 17.14,25.38 15.49,27.67 14.22,29.83 17.14,29.83 18.92,29.83 14.1,26.78 15.75,29.83 94.74,48.62 94.62,50.66 104.14,53.7 100.33,47.99 101.98,52.94 109.6,46.46 84.45,66.91 6.22,31.1 6.22,29.45 3.68,30.97 3.68,29.19 8.64,29.95 8.64,31.35 12.83,29.83 12.83,31.48 1.4,31.22 1.4,29.57 1.4,28.18 1.65,20.94 83.06,12.94 83.06,14.71 83.06,16.37 83.06,17.64 81.79,20.18 81.79,21.7 83.57,21.7 82.3,22.97 81.79,27.92 84.2,25.89 86.49,25.76 85.6,24.87 75.18,22.33 77.6,66.78 47.12,37.83 44.2,41 45.21,41.89 49.53,38.08 45.21,40.11 41.53,40.24 39.62,40.24 37.34,37.7 38.99,43.8 36.58,40.37 89.54,28.05 90.81,27.41 103.51,44.18 103.63,46.59 105.92,45.7
  pour Top (rank 2, no thermals): 113.92,-1.29 113.92,16.37 108.08,16.37 108.08,34.53 113.92,34.53 113.92,70.34 60.33,70.34 60.33,75.67 -4.7,75.67 -4.7,-1.03 8.51,-1.16 8.51,11.92 25.27,11.92 25.27,-1.16 51.44,-1.16 51.44,17.76 72.26,17.76 72.26,10.78 88.27,10.78 88.27,-1.29
  pour Top (no thermals): 17.02,22.72 14.86,22.72 14.86,24.37 14.86,26.53 14.86,28.43 20.32,28.43 20.32,25.38 20.57,25.38 20.57,24.11 17.02,24.11
  pour Bottom (rank 2, no thermals): 113.92,-1.29 113.92,16.37 108.08,16.37 108.08,34.53 113.92,34.53 113.92,70.34 60.33,70.34 60.33,75.67 -4.7,75.67 -4.7,-1.03 8.51,-1.03 8.51,11.92 25.27,11.92 25.27,-1.29 51.44,-1.16 51.44,17.76 72.26,17.76 72.26,10.78 88.27,10.78 88.27,-1.29
  pour Route15 (rank 2, no thermals): 113.92,-1.29 113.92,16.37 108.08,16.37 108.08,34.53 113.92,34.53 113.92,70.34 60.33,70.34 60.33,75.67 -4.7,75.67 -4.7,-1.03 8.51,-1.03 8.51,11.92 25.27,11.92 25.27,-1.16 51.44,-1.16 51.44,17.76 72.26,17.76 72.26,10.78 88.27,10.78 88.27,-1.29
  pour Route2 (rank 2, no thermals): 113.92,-1.29 113.92,16.37 108.08,16.37 108.08,34.53 113.92,34.53 113.92,70.34 60.33,70.34 60.33,75.67 -4.7,75.67 -4.7,-1.03 8.51,-1.16 8.51,12.05 25.27,12.05 25.27,-1.16 51.44,-1.16 51.44,17.76 72.26,17.76 72.26,10.78 88.27,10.78 88.27,-1.29
GPIO1  (via drill 0.33)
  Top 0.254: U1.29 24.59,59.62 v25.27,60.31 | v88.01,28.18 88.01,27.29 89.03,26.27 90.75,26.27 R15.1
  Route15 0.254: v25.27,60.31 89.03,60.31 93.6,55.74 93.6,33.76 v88.01,28.18
GPIO11  (via drill 0.33)
  Top 0.254: U1.37 44.83,58.14 44.83,56.62 45.59,55.86 48.77,55.86 52.7,51.93 52.7,43.54 54.61,41.64 v54.61,36.18
  Bottom 0.254: S1.2 97.26,1.78 96.14,2.9 96.14,4.68 97.54,6.08 97.54,22.08 93.42,26.2 87.71,26.2 87.07,26.83 74.3,26.83 70.41,30.72 60.07,30.72 v54.61,36.18
GPIO15
  Top 0.254: U1.38 47.45,60.51 48.64,61.7 53.17,61.7 RN1.1
GPIO16
  Top 0.254: U1.39 49.91,58.14 49.91,57.01 50.29,56.62 57.4,56.62 58.17,57.39 58.17,60.94 58.76,61.54 RN2.1
GPIO18  (via drill 0.33)
  Top 0.254: v31.75,38.21 31.45,37.91 U1.18
  Bottom 0.254: ROUTER.10 42.16,16.43 42.16,29.32 33.27,38.21 v31.75,38.21
GPIO19  (via drill 0.33)
  Top 0.254: v24.26,40.37 24.18,40.45 U1.19
  Bottom 0.254: ROUTER.6 36.32,15.67 36.32,29.83 25.78,40.37 v24.26,40.37
GPIO20  (via drill 0.33)
  Top 0.254: U1.20 27.36,42.99 v28.58,41.77 32.64,41.77 35.31,39.1 50.04,39.1 53.85,35.29 55.12,35.29 56.39,34.02 56.39,32.49 57.53,31.35 68.58,31.35 71.12,28.81 76.83,28.81 77.47,29.45 77.47,35.29 76.94,35.82 BEE-CON-1.5
  Bottom 0.254: ROUTER.5 37.47,14.27 37.47,21.45 41.15,25.13 41.15,28.81 35.18,34.78 32.26,34.78 28.58,38.46 v28.58,41.77
GPIO21  (via drill 0.33)
  Top 0.254: v32.89,35.67 23.5,35.67 22.48,34.65 17.65,34.65 16.97,33.97 U1.16
  Bottom 0.254: ROUTER.8 41.66,18.46 41.66,29.07 35.05,35.67 v32.89,35.67
GPIO22  (via drill 0.33)
  Top 0.254: v26.67,36.81 17.65,36.81 16.13,35.29 14.51,35.29 U1.17
  Bottom 0.254: ROUTER.7 37.53,11.79 35.56,11.79 34.92,12.43 34.92,20.81 35.81,21.7 35.81,29.57 28.58,36.81 v26.67,36.81
GPIO23  (via drill 0.33)
  Top 0.254: v28.07,44.18 26.72,45.53 U1.21
  Bottom 0.254: ROUTER.9 42.67,14.4 42.67,29.57 37.21,35.03 | 37.21,35.03 v28.07,44.18 | 37.21,35.16 37.21,35.03
GPIO24  (via drill 0.33)
  Top 0.254: v46.23,31.35 46.48,31.1 49.28,31.1 49.99,31.81 U1.3
  Bottom 0.254: ROUTER.12 43.89,16.31 46.74,19.16 46.74,22.59 48.39,24.24 48.39,30.08 47.75,30.72 46.86,30.72 v46.23,31.35
GPIO26
  Top 0.254: U1.47 57.86,42.99 59.44,44.56 59.44,46.54 60.33,47.43 60.33,57.13 61.09,57.89 61.09,60.99 RN2.4
GPIO27  (via drill 0.33)
  Top 0.254: RN2.2 59.31,61.2 58.8,60.69 58.8,58.28 59.82,57.26 59.82,47.73 58.8,46.72 58.79,46.72 U1.46 54.31,45.53 v53.72,44.94
  Bottom 0.254: v53.72,44.94 53.72,40.8 R11.2
GPIO28  (via drill 0.33)
  Top 0.254: v19.43,59.67 19.51,59.6 U1.27 | v79.38,69.58 79.38,69.15 R25.1
  Bottom 0.254: v19.43,59.67 24,59.67 25.15,58.53 30.23,58.53 31.24,59.55 54.1,59.55 54.48,59.93 58.8,59.93 59.82,60.94 59.82,65.39 61.85,67.42 63.12,67.42 64.64,68.94 77.85,68.94 78.49,69.58 v79.38,69.58
LED0  (via drill 0.33)
  Top 0.254: R19.1 58.45,65.54 v58.42,65.51 | v27.05,59.42 27.05,58.29 U1.30
  Bottom 0.254: v58.42,65.51 58.42,61.45 57.91,60.94 53.85,60.94 53.47,60.56 28.19,60.56 v27.05,59.42
LED2  (via drill 0.33)
  Top 0.254: R21.1 71.06,68.25 70.48,68.82 63.12,68.82 v62.61,68.31 | v29.72,59.42 29.72,58.27 U1.31
  Bottom 0.254: v62.61,68.31 61.98,68.31 59.31,65.64 59.31,61.45 58.29,60.43 54.23,60.43 53.85,60.05 30.35,60.05 v29.72,59.42
LED6  (via drill 0.33)
  Top 0.254: U1.28 22.1,58.27 v22.1,58.78 | v63.63,65.51 64.48,65.51 R23.1
  Bottom 0.254: v22.1,58.78 22.86,58.02 30.48,58.02 31.5,59.04 54.36,59.04 54.74,59.42 59.06,59.42 62.36,62.72 62.36,64.24 v63.63,65.51
N$1
  Top 0.254: R25.2 81.42,68.01 SYS.A
N$2
  Top 0.406: J1.GND@1 18.67,4.21 18.67,4.17
  Top 2.184: J1.GND@2 19.74,4.17 18.67,4.17 18.03,4.17 17.65,4.55 L5.2
N$3
  Top 2.184: F1.2 22.91,14.16 26.92,10.14 26.92,8.57 L4.2
N$4
  Bottom 0.254: T4.2 48.4,37.23 R11.1
N$5  (via drill 0.33)
  Top 0.254: RN1.8 51.19,62.84 v51.05,62.97 | v51.56,67.8 51.56,68.94 50.67,69.83
  Top 1.016: SCREW.1 47.7,66.86 50.67,69.83 51.44,70.59 53.83,70.59 X1.1
  Bottom 0.254: v51.05,62.97 51.05,67.29 v51.56,67.8
N$6  (via drill 0.33)
  Top 0.254: RN2.8 58.16,62.71 v57.28,61.83
  Bottom 0.254: v57.28,61.83 56.77,61.83 55.88,62.72 55.88,64.12 56.26,64.5 56.26,65.01 55.75,65.51 55.75,70.12 X1.2
  Bottom 1.016: SCREW.2 48.74,63.07 49.91,64.24 49.91,70.17 X1.2
N$7
  Bottom 0.61: T1.13 56.83,11.94 R6.1
N$8
  Top 0.254: RN2.5 60.36,63.83 59.56,64.62 57.91,64.62 55.63,66.91 55.63,68.69 58.17,71.23 58.17,74.15 57.4,74.91 51.15,74.91 X1.3
  Top 0.406: SCREW.3 45.16,70.29 46.23,71.36 47.59,71.36 X1.3
N$9  (via drill 0.33)
  Top 0.254: RN2.7 59.31,63.22 58.93,63.61 57.28,63.61 v56.77,63.1
  Bottom 0.254: v56.77,63.1 56.77,65.26 56.26,65.77 56.26,70.59 54.61,72.25 54.61,74.02 53.85,74.79 47.52,74.79 X1.4
  Bottom 0.406: SCREW.4 45.16,63.3 46.48,64.62 46.48,72.39 X1.4
N$10  (via drill 0.33)
  Top 0.254: RN1.6 54.35,63.49 54.1,63.74 53.21,63.74 v52.83,64.12
  Top 0.406: SCREW.5 42.62,72.75 X1.5
  Bottom 0.254: v52.83,64.12 52.83,62.34 52.07,61.58 44.58,61.58 43.81,62.34 43.81,64.42 SCREW.5
N$11
  Top 0.254: RN2.6 59.81,63.49 59.18,64.12 56.9,64.12 55.25,65.77 51.31,65.77 49.91,64.37 43.92,64.37 SCREW.6
  Top 0.406: SCREW.6 41.28,64.42 41.28,70.85 39.06,73.07 X1.6
N$12
  Top 2.184: J1.PWR 18.62,13.94 F1.1
N$13
  Top 0.254: SENSOR.C 86.85,67.46 R20.2
N$14  (via drill 0.33)
  Top 0.254: RN1.5 54.9,64.46 v54.61,64.75
  Top 0.406: X1.7 40.08,68.29 SCREW.7
  Bottom 0.254: v54.61,64.75 54.61,62.85 52.83,61.07 39.75,61.07 38.73,62.09 38.73,64.27 SCREW.7
N$15
  Top 0.406: SCREW.8 38.86,64.29 38.86,66.78 32.58,73.07 X2.1
N$16
  Top 0.305: Q1.1 88.39,22.84 87.5,21.95 87.5,21.42 R57.1 U3.3
N$17
  Top 0.61: U3.7 R10.1
N$18
  Top 0.305: U12.26 65.24,46.07 R86.1
N$19
  Top 0.406: Q1.3 91.06,24.87 R15.2 R14.2
N$20
  Top 0.61: U3.6 C58.2
N$22
  Top 0.305: R55.1 R56.2 80.31,22.99 U3.5
N$23
  Top 0.305: WIFI.A 60.73,65.94 R19.2
N$24
  Top 0.305: U2.1 7.16,33.15 C1.2
  Top 0.61: 7.37,37.5 L6.P$1 | C1.2 7.16,34.91 7.37,34.91
  Top 0.813: U2.1 7.62,32.95 7.62,37.07 7.28,37.07 L6.P$1
N$25
  Top 0.305: R46.2 4.83,35.03 U2.3
N$26
  Top 0.61: R7.1 6.1,24.82 U2.7
N$27
  Top 0.61: C1.1 6.1,35.09 U2.2
N$29
  Top 0.61: C57.1 R9.2
N$30
  Top 0.305: R21.2 72.35,66.91 LAN.C
N$31
  Top 0.61: C57.2 U2.6
N$32
  Top 0.61: R16.1 C58.1
N$33
  Top 0.406: SCREW.9 37.08,66.07 37.08,67.04 32.89,71.23 29.97,71.23 28.3,72.9 X2.2
N$34
  Top 0.406: U3.1 87.66,18.65 C17.2 91.8,19.08 L2.P$1
  pour Top (no thermals): 85.22,18.78 87.25,18.78 87.25,19.03 89.03,19.03 89.03,19.92 94.87,19.92 94.87,18.14 94.87,17.76 84.71,17.76 84.71,18.78
N$35
  Top 0.406: PWR.C 93.12,68.44 R24.2
N$36
  Bottom 0.406: SCREW.10 37.54,63.15 36.32,64.37 36.32,66.4 32.13,70.59 26.8,70.59 24.89,72.5 24.89,72.98 X2.3
N$37
  Top 0.406: SCREW.11 34.42,66.2 34.42,67.17 32,69.58 24.38,69.58 21.3,72.66 X2.4
N$38
  Bottom 0.406: SCREW.13 32.29,65.61 28.32,69.58 17.79,69.58 X2.6
N$39  (via drill 0.33)
  Top 0.203: v60.71,24.87 60.71,24.28 60.56,24.13 R33.2 | v57.15,24.49 C35.1
  Top 0.254: C35.1 R34.2
  Bottom 0.203: v60.71,24.87 60.33,24.49 v57.15,24.49
N$40  (via drill 0.33)
  Top 0.203: v54.74,24.49 54.74,24.03 R35.2 | v51.82,24.49 51.79,24.49 C36.1
  Top 0.254: C36.1 R36.2
  Bottom 0.203: v54.74,24.49 v51.82,24.49
N$41
  Bottom 0.61: J2.2-8 72.81,6.42 72.14,7.09 R1.2
  Bottom 1.016: J2.2-7 75.1,4.64 74.55,5.19 74.55,6.36 J2.2-8
N$42
  Bottom 0.61: J2.2-4 78.57,7.27 76.94,8.9 R2.2
  Bottom 1.016: J2.2-5 77.55,4.88 78.11,5.44 78.11,5.96 J2.2-4
N$43  (via drill 0.25)
  Top 0.203: v70.61,24.75 70.61,24.03 R29.2 C33.1 | v68.58,24.75 68.68,24.64 R30.2
  Bottom 0.203: v70.61,24.75 v68.58,24.75
N$44  (via drill 0.33)
  Top 0.203: C34.1 R31.2 64.77,24.16 v64.77,24.75 | v61.98,24.75 R32.2
  Bottom 0.203: v64.77,24.75 v61.98,24.75
N$45
  Bottom 0.61: T1.18 66.83,12.53 69.22,10.14 71.89,10.14 R3.1
N$46
  Bottom 0.61: R3.2 73.04,9.9 R1.1 75.28,8.91 R2.1 75.31,8.92 75.31,10.14 75.37,10.2 81.19,10.2 C6.1
N$47
  Bottom 0.406: SCREW.14 31.52,63.07 26.67,67.93 14.22,67.93 10.67,71.48 10.67,72.93 X2.7
N$48
  Top 0.406: SCREW.12 33.66,64.42 33.66,66.4 31.5,68.56 22.31,68.56 X2.5
N$49
  Top 0.305: R41.2 R8.1 2.79,27.14 3.56,27.14 U2.5
N$51
  Bottom 0.61: J2.1-8 58.09,7.07 R5.2
  Bottom 1.016: J2.1-7 58.74,5.66 J2.1-8
N$52
  Bottom 0.61: J2.1-4 62.82,8.04 R4.2
  Bottom 1.016: J2.1-5 61.8,4.88 62.36,5.44 62.36,5.96 J2.1-4
N$54
  Bottom 0.61: R6.2 59,9.96 58.8,9.76 | 58.8,9.76 56.37,9.76 C7.1 | R5.1 59,9.56 | 59,9.56 58.8,9.76 | R4.1 59.08,9.63 59,9.56
N$55
  Top 0.61: C17.1 85.55,20 U3.2
N$109  (via drill 0.33)
  Top 0.305: U12.14 73.24,39.32 v73.41,39.48
  Bottom 0.305: v73.41,39.48 73.41,38.77 R81.2
N$111  (via drill 0.33)
  Top 0.254: U12.17 70.99,44.55 70.99,45.58 72.01,46.59 v73.91,46.59
  Bottom 0.305: R82.1 69.14,48.8 69.85,49.51 72.9,49.51 73.91,48.5 v73.91,46.59
N$112  (via drill 0.33)
  Top 0.305: U12.19 69.72,46.72 v69.98,46.97
  Bottom 0.305: R83.1 69.19,47.76 v69.98,46.97
N$113  (via drill 0.33)
  Top 0.254: U12.18 70.36,45.83 72.01,47.48 v73.03,47.48
  Bottom 0.254: 72.42,47.63 R85.1 | R85.1 R84.2 | R85.1 72.87,47.63 v73.03,47.48
P0_R_N
  Top 0.203: T1.17 64.11,12.93 64.11,11.25 65.12,10.24 69.56,10.24 70.96,8.85 74.92,8.85 76.53,7.24 J2.2-6
P0_R_P
  Top 0.203: T1.16 63.65,12.81 63.65,11.06 64.93,9.79 69.37,9.79 70.77,8.39 74.73,8.39 75.51,7.61 75.51,6.01 76.08,5.44 76.28,5.44 76.4,5.32 76.68,5.32 76.78,5.42 76.89,5.42 77.22,5.75 77.8,5.75 78.05,5.49 78.21,5.49 79.06,4.64 J2.2-3
P0_RX_N
  Top 0.203: U1.8 37.29,32.11 36.27,31.1 36.27,30.55 36.91,29.9 42.5,29.9 43.77,28.63 61.81,28.63 63.83,26.61 63.83,23.09 | T1.4 63.83,22.26 63.83,22.97 63.83,23.09 | R31.1 63.83,23.09
P0_RX_P
  Top 0.203: U1.9 34.75,32.22 35.87,31.1 35.87,30.38 36.75,29.5 42.33,29.5 43.6,28.23 61.64,28.23 63.42,26.44 63.42,23.1 | 63.42,23.1 63.42,21.86 T1.5 | R32.1 63.42,23.09 63.42,23.1
P0_T_N
  Top 0.203: T1.20 70.05,12.87 70.05,12.24 71.44,10.85 77.36,10.85 80.04,8.18 80.04,6.99 J2.2-2
P0_T_P
  Top 0.203: T1.19 69.6,12.87 69.6,12.05 71.25,10.4 77.17,10.4 79.58,7.99 79.58,6.05 80.16,5.47 80.31,5.47 80.42,5.37 80.9,5.37 J2.2-1
P0_TX_N
  Top 0.203: U1.5 44.91,32.37 43.89,31.35 43.89,30.67 44.41,30.16 67.9,30.16 69.8,28.26 69.8,23.1 | 69.8,23.1 69.8,22.29 T1.1 | R29.1 69.8,23.1
P0_TX_P
  Top 0.203: U1.6 42.37,32.47 43.48,31.35 43.48,30.51 44.24,29.75 67.73,29.75 69.39,28.09 69.39,22.97 | 69.39,22.97 69.39,21.83 T1.2 | R30.1 68.68,22.97 69.39,22.97
P4_R_N
  Top 0.203: T1.12 54.83,13.05 54.08,12.3 54.08,10.49 55.21,9.36 58.26,9.36 60.78,6.84 J2.1-6
P4_R_P
  Top 0.203: T1.11 52.83,13.1 53.62,12.3 53.62,10.3 55.02,8.9 58.07,8.9 59.72,7.25 59.72,5.86 60.01,5.57 60.26,5.57 60.45,5.38 61.15,5.38 61.59,5.82 62.04,5.82 63.22,4.64 J2.1-3
P4_RX_N
  Top 0.203: U1.14 22.05,32.37 20.9,31.22 20.9,30.29 21.93,29.27 26.63,29.27 28.66,27.24 40.72,27.24 42.12,25.84 52.92,25.84 53.92,24.83 53.92,23.1 53.92,23.09 | 53.92,23.09 53.92,21.83 54.49,21.26 T1.9 | R35.1 53.92,23.09
P4_RX_P
  Top 0.203: U1.15 19.51,32.22 20.5,31.22 20.5,30.12 21.76,28.86 26.46,28.86 28.49,26.83 40.56,26.83 41.95,25.43 52.75,25.43 53.52,24.66 53.52,23.22 53.52,23.09 | 53.52,23.09 53.52,21.83 52.95,21.26 T1.10 | R36.1 53.52,23.09
P4_T_N
  Top 0.203: T1.15 60.05,12.86 60.05,10.68 61.25,9.48 63.09,9.48 64.86,7.71 J2.1-2
P4_T_P
  Top 0.203: T1.14 59.59,12.88 59.59,10.49 61.06,9.02 62.9,9.02 63.82,8.1 63.82,6.08 64.52,5.38 64.9,5.38 65.63,4.64 J2.1-1
P4_TX_N
  Top 0.203: 59.77,22.97 59.77,26.1 58.5,27.36 43.01,27.36 41.74,28.63 36.15,28.63 35.52,29.27 29.55,29.27 28.65,30.17 28.65,31.2 29.67,32.21 | 59.77,22.97 59.77,22.32 T1.6 | R33.1 59.89,23.09 59.77,22.97
  Top 0.254: U1.11 29.67,32.21
P4_TX_P
  Top 0.203: 59.36,23.09 59.36,25.93 58.34,26.96 42.84,26.96 41.57,28.23 35.98,28.23 35.35,28.86 29.38,28.86 28.25,30 28.25,31.2 27.13,32.32 | 59.36,23.09 59.36,21.8 T1.7 | R34.1 59.36,23.09
  Top 0.254: U1.12 27.13,32.32
RESET_ROUTE  (via drill 0.33)
  Top 0.254: v58.8,49.26 59.18,49.64 59.18,51.8 57.83,53.15 U1.43
  Bottom 0.254: ROUTER.3 33.73,12.61 35.18,11.16 46.74,11.16 47.62,12.05 47.62,17.38 48.26,18.02 48.26,21.57 50.04,23.35 50.04,31.61 50.55,32.11 50.55,35.42 55.37,40.24 55.37,46.59 58.04,49.26 v58.8,49.26
SENSOR_LED  (via drill 0.33)
  Top 0.254: v61.85,50.02 61.85,56.62 64.14,58.91 68.71,58.91 73.91,64.12 v76.96,64.12 | v84.58,68.31 85.93,68.31 R20.1
  Bottom 0.254: ROUTER.16 48.97,21.52 50.55,23.1 50.55,31.35 51.05,31.86 51.05,35.16 55.88,39.99 55.88,46.34 57.78,48.24 59.44,48.24 61.21,50.02 v61.85,50.02 | v76.96,64.12 81.03,64.12 82.93,66.02 82.93,67.42 83.82,68.31 v84.58,68.31
SIM_CLK  (via drill 0.33)
  Top 0.254: v80.9,49.77 85.98,49.77 | 85.98,49.77 90.39,49.77 SIM1.C3 | U4.5 85.85,49.64 85.98,49.77
  Bottom 0.254: BEE-CON-1.9 78.38,27.82 80.14,29.57 80.14,49 v80.9,49.77
SIM_DATA  (via drill 0.25)
  Top 0.254: U4.6 85.2,48.38 85.47,48.12 88.9,48.12 89.15,48.37 90.33,48.37 SIM1.C7 90.52,48.37 v91.95,48.37
  Bottom 0.254: v91.95,48.37 92.96,47.35 92.96,31.35 96.5,27.82 BEE-CON-2.2
SIM_RST  (via drill 0.33)
  Top 0.254: U4.4 87.31,48.81 v87.38,48.88 | v87.88,52.05 90.2,52.05 SIM1.C2 90.52,52.18 v92.58,52.18
  Bottom 0.254: v87.38,48.88 87.38,51.54 v87.88,52.05 | v92.58,52.18 92.71,52.31 94.62,52.31 99.82,47.1 99.82,32.75 98.89,31.82 BEE-CON-2.4
SIM_VCC  (via drill 0.25, 0.33)
  Top 0.254: U4.1 85.2,47.34 85.47,47.61 87.76,47.61 88.14,47.23
  Top 0.305: SIM1.C1 90.39,54.85 v88.65,54.85 88.52,54.72 C16.2 | v90.81,36.18 91.16,35.82 BEE-CON-2.6
  Top 0.406: v88.14,46.97 88.14,47.23
  Bottom 0.305: v88.65,54.85 89.28,54.21 89.28,46.97 v88.14,46.97 90.81,44.31 v90.81,36.18
UART_RX  (via drill 0.33)
  Top 0.254: v34.92,54.47 34.92,58.04 U1.33 | v44.2,45.7 v41.78,45.7
  Bottom 0.254: ROUTER.13 46.43,13.37 45.21,14.59 45.21,16.62 47.24,18.65 47.24,22.21 48.89,23.86 48.89,30.46 48.26,31.1 48.26,34.15 42.55,39.86 42.55,45.7 | v34.92,54.47 35.43,53.96 37.72,53.96 42.55,49.13 42.55,45.7 | U6.3 v44.2,45.7 | v41.78,45.7 42.55,45.7
UART_TX  (via drill 0.33)
  Top 0.254: v37.34,55.1 37.34,58.16 U1.34
  Bottom 0.254: ROUTER.14 46.43,17.08 47.75,18.4 47.75,21.95 49.4,23.6 49.4,30.72 48.77,31.35 48.77,34.4 43.05,40.11 43.05,44.69 | 43.05,44.69 43.05,49.39 v37.34,55.1 | U6.2 45.34,45.2 44.7,44.56 43.18,44.56 43.05,44.69
USB1_N
  Top 0.191: U12.10 69.72,38.39 69.78,38.34 69.78,34.32 73.45,30.65 75.3,30.65 BEE-CON-1.8
USB1_P
  Top 0.191: U12.11 70.36,38.53 70.17,38.34 70.17,34.48 73.61,31.04 75.35,31.04 BEE-CON-1.7
USB2_N
  Top 0.127: D7.P$2 105.48,33.64
  Top 0.191: U12.8 68.44,40.13 69.89,41.58 72.82,41.58 73.72,42.48 73.72,45.15 74.72,46.15 77.68,46.15 82.25,41.58 91.99,41.58 96.18,45.77 100.16,45.77 105.48,40.45 105.48,33.64 105.48,25.81 104.6,24.93 103.63,24.93 103.08,24.37 USB.2
USB2_P
  Top 0.127: D9.P$2 104.9,33.76 105.09,33.76
  Top 0.191: U12.9 69.08,40.21 70.06,41.19 72.98,41.19 74.11,42.32 74.11,44.99 74.89,45.76 77.52,45.76 82.09,41.19 92.16,41.19 96.35,45.38 99.99,45.38 105.09,40.29 105.09,33.76 105.09,25.97 104.44,25.33 103.63,25.33 102.86,26.09 USB.3
USB3.3  (via drill 0.33)
  Top 0.254: 67.69,46.85 67.44,46.59 v67.18,46.59 66.95,46.36 R86.2 | U12.13 71.64,40.35 v71.63,40.37
  Top 0.305: U12.13 71.64,37.61 C5.1 | U12.21 68.44,45.97 67.69,46.72 67.69,46.85 67.69,47.49 C4.1
  Bottom 0.254: v71.63,40.37 71.63,40.5 68.45,43.67 68.45,45.83 67.69,46.59
  Bottom 0.305: v67.18,46.59 67.69,46.59 67.84,46.59 68.25,47 R83.2 68.22,47.79 R82.2
USB_GND  (1 unrouted)
USB_N
  Top 0.191: U1.50 58.72,36.49 59.64,36.49 60.78,37.62 60.78,40.03 62.82,42.08 68.28,42.08 68.92,42.71 71.58,42.71 72.28,43.41 U12.15
USB_P
  Top 0.191: U1.49 58.62,36.88 59.48,36.88 60.38,37.78 60.38,40.2 62.66,42.47 68.12,42.47 68.75,43.11 71.19,43.11 71.63,43.54 71.63,44.52 U12.16
VCC18  (via drill 0.33)
  Top 0.254: C11.1 63.96,44.92 U12.28 63.61,44.54 v63.37,44.31 | v71.75,34.91 71.75,35.84 C12.1
  Top 0.305: U12.12 71,36.59 C12.1
  Bottom 0.254: v63.37,44.31 66.93,44.31 70.36,40.88 70.36,40.37 70.99,39.73 70.99,35.67 v71.75,34.91
VIN  (via drill 0.33)
  Top 0.305: R46.1 3.84,35.95 v3.56,35.67 | v8.64,24.37 8.89,24.62 8.89,25.28 | 7.87,27.41 7.37,27.41 U2.8 | R57.2 v89.41,21.19 | v78.74,17.51 78.74,18.52 78.87,18.65
  Top 0.406: 77.75,17 77.75,18.65 78.87,18.65 U3.8
  Top 1.27: ROUTER.15 49.21,13.32 50.67,13.32 50.8,13.44 50.8,15.35 54.48,19.03 72.9,19.03 72.9,17 77.75,17 C22.1 78.76,13.62 C56.1 | 16.26,18.02 C14.+ 16.26,20.15 U5.3
  Top 1.422: 7.87,27.41 7.87,26.4 7.75,26.4 7.75,25.28 8.89,25.28 C53.1 C19.1 12.83,18.02 16.26,18.02
  Top 1.676: ROUTER.15 48.97,8.11 36.7,8.11 33.07,4.48 L4.1 31.24,4.48 31.24,9.76 25.78,15.22 25.78,17.76
  Top 1.778: 25.78,17.76 25.78,18.02 16.26,18.02
  Bottom 0.305: v8.64,24.37 7.49,25.51 7.49,31.48 3.56,35.42 v3.56,35.67 | v89.41,21.19 84.71,21.19 81.66,18.14 79.38,18.14 v78.74,17.51
  pour Top (no thermals): 72.52,18.91 80.65,18.91 80.65,17.89 79.5,17.89 79.5,12.68 77.47,12.68 77.47,16.24 72.52,16.24
YELLOW
  Top 0.305: WAN.C 65.53,65.65 R23.2

## Text on the board
tPlace: SYS | BEE-VIN | BEE_TXD | BEE_RXD | 5V | IO20 | USB+ | 3.3V | USB- | BEE-VIN | GND | LDO_5V | VDD3.3V | GND | GPIO19 | GPIO21 | GPIO18 | GPIO24 | TXD | SENSOR | RESET | GPIO20 | GPIO22 | GPIO23 | GND | RXD | RAW_VCC
tDocu: SIM | Model: MS14N-V1.3
214bmp: D:/SmartProjects/Snc/a4_bn_logo2.bmp